# Altium PCB cirq_lcd.PcbDoc
Units mm, origin at the board's own origin, x right, y up, seen from the top; angles counter-clockwise.
Board outline 30 x 41.2 mm, 2 copper layers (Top Layer, Bottom Layer); 33 components, 26 nets, 145 pads, 60 vias.
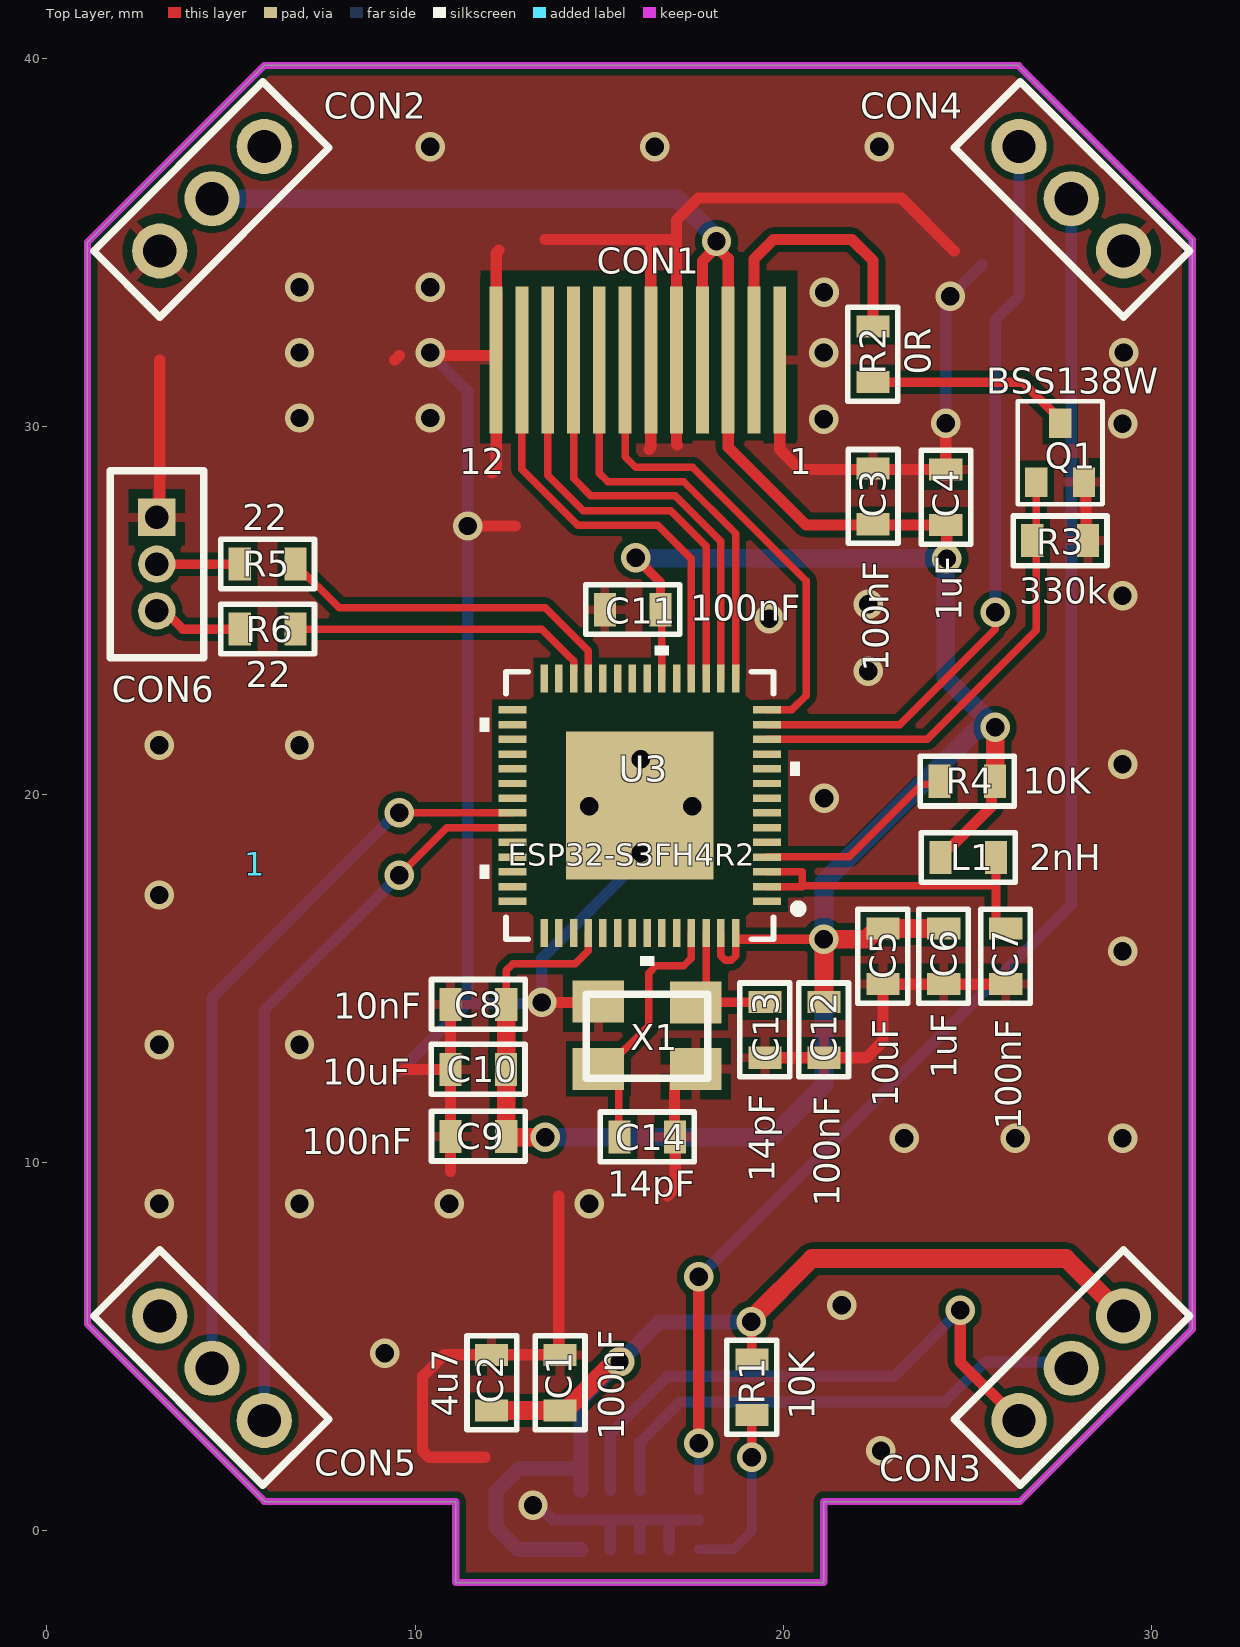
[diagram p0: Top Layer view]
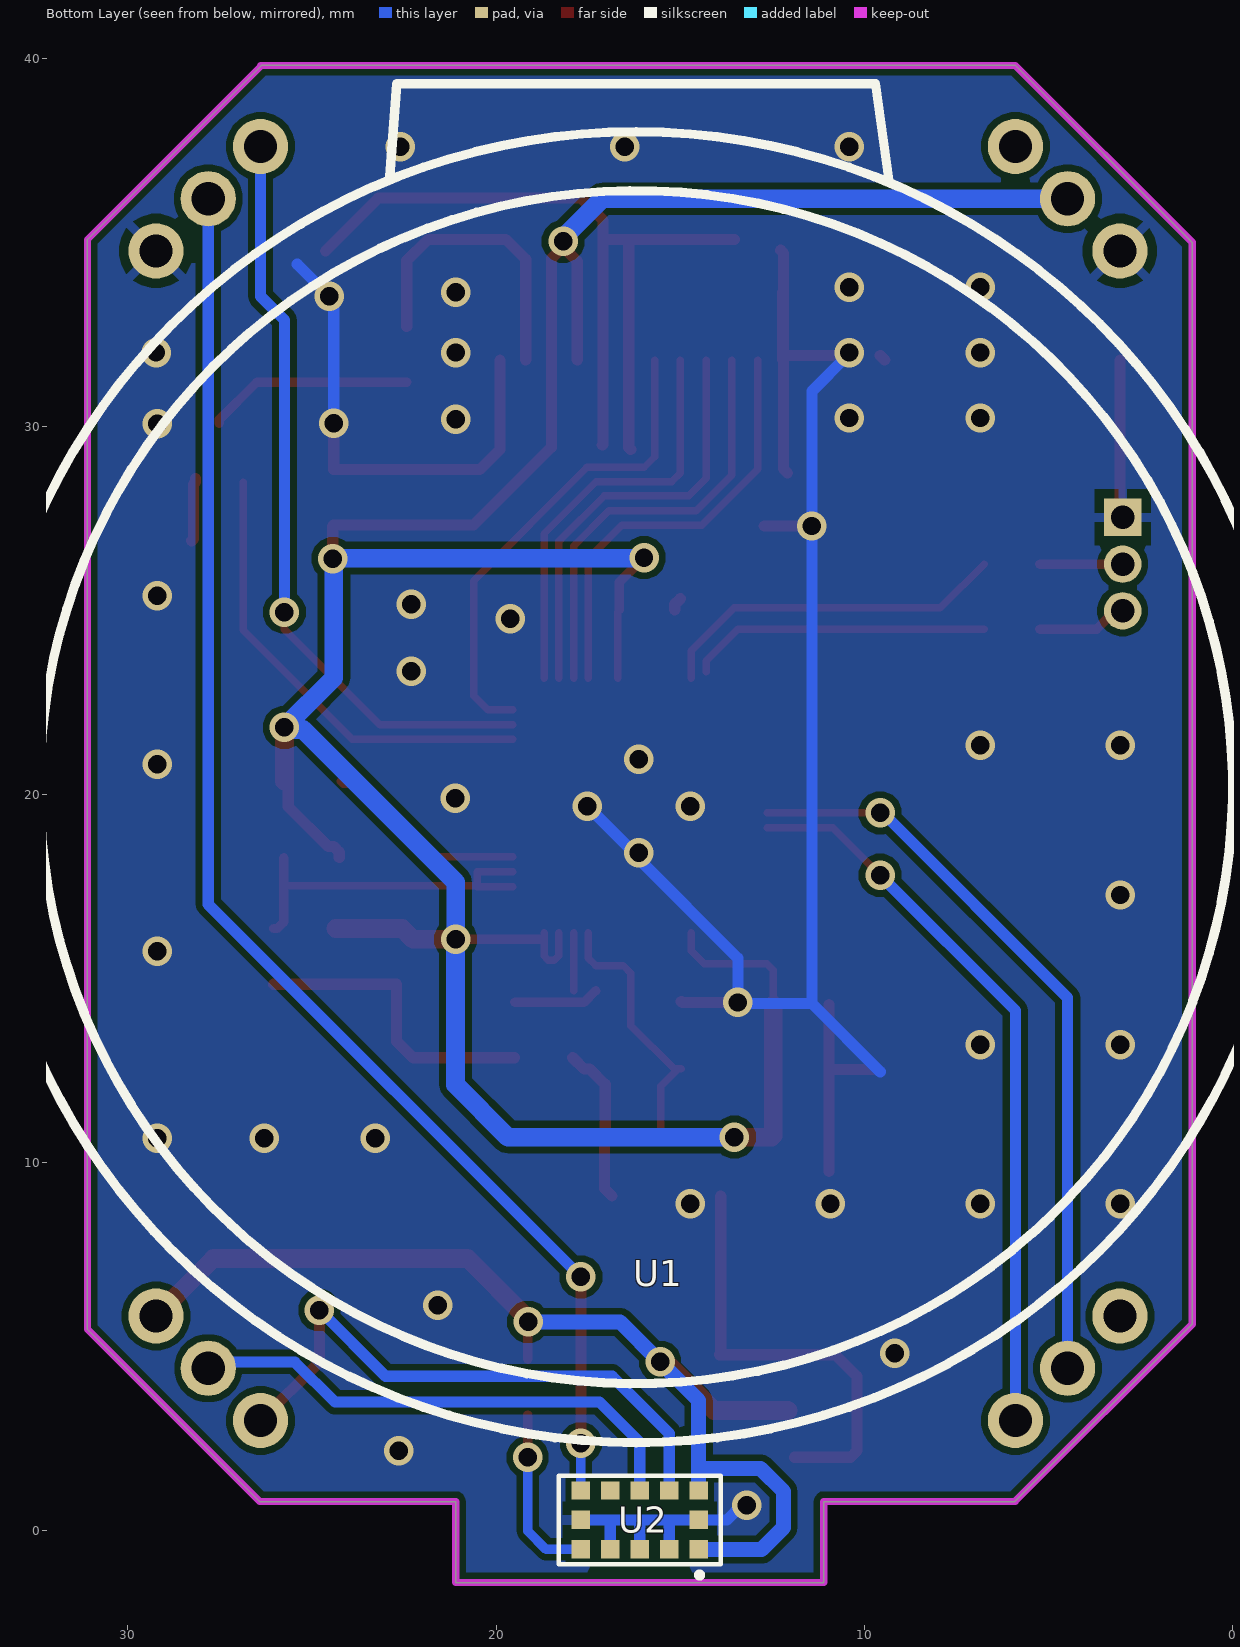
[diagram p1: Bottom Layer view, seen from below]
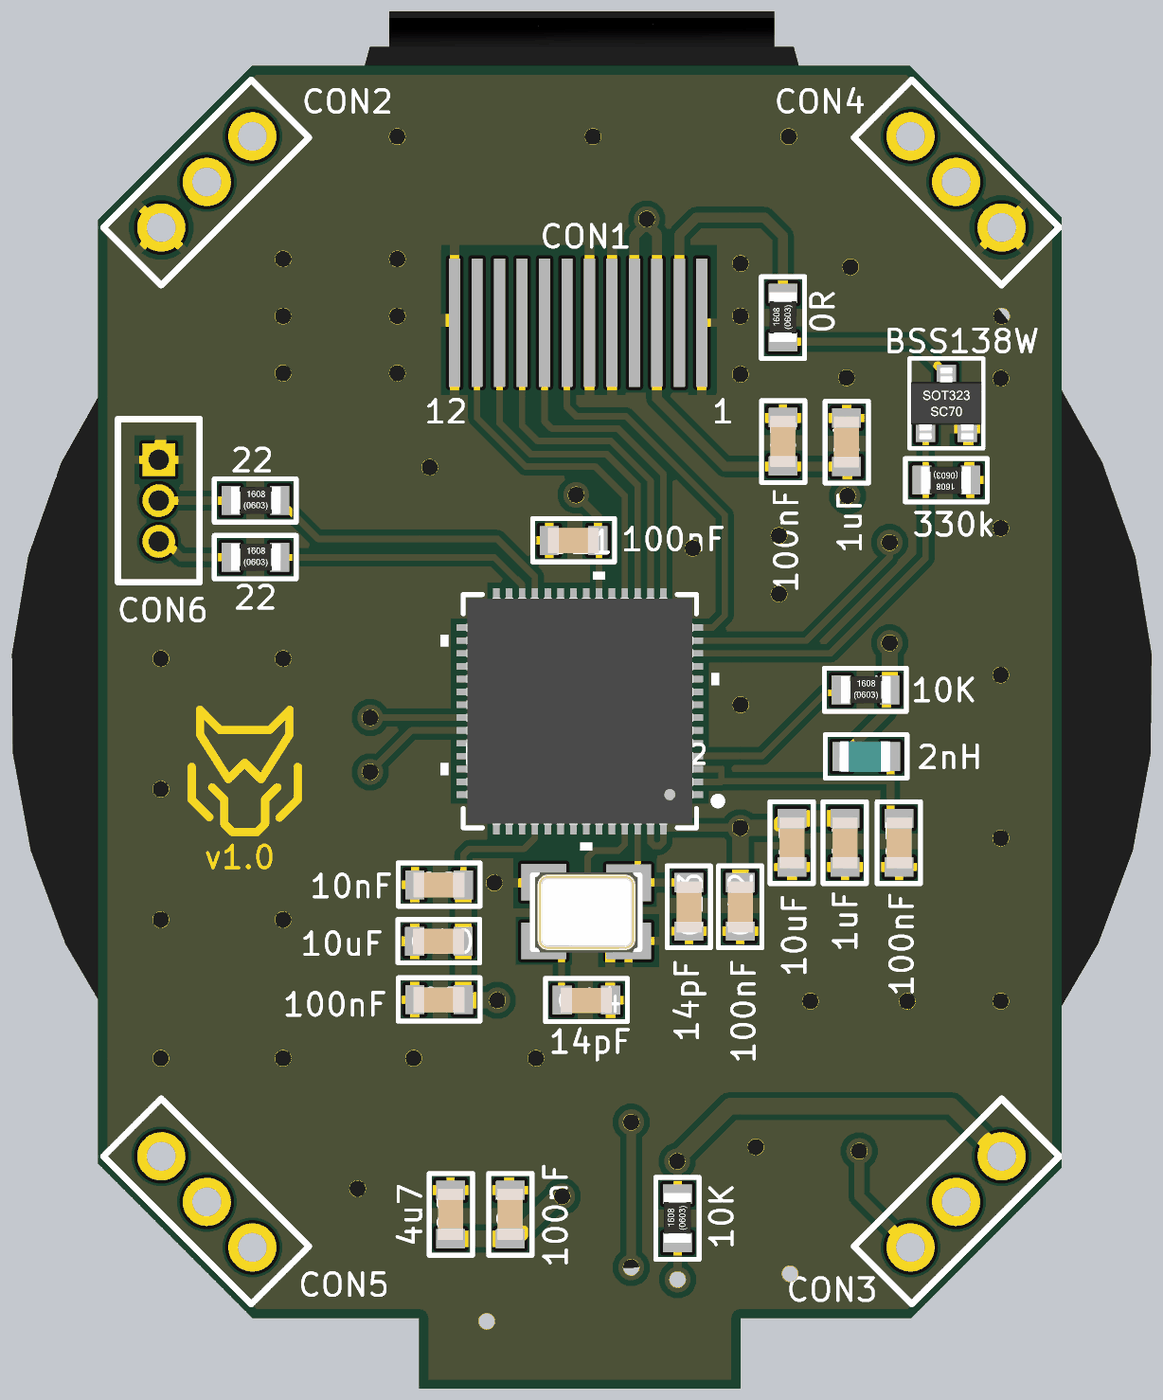
[diagram p2: 3D render of the assembled board from above, using the file's embedded part models]

## Layer stack, top to bottom
Top Solder: solder mask 0.0102, Solder Resist, Dk 3.5
Top Layer: signal copper 0.0356
Dielectric1: dielectric 0.32, FR-4, Dk 4.8
Bottom Layer: signal copper 0.0356
Bottom Solder: solder mask 0.0102, Solder Resist, Dk 3.5

## Board outline
5.916,0.8 1.1,5.616 1.1,35 5.9,39.8 26.375,39.8 31.1,35.075 31.1,5.475 26.425,0.8 21.1,0.8 21.1,-1.4 11.1,-1.4 11.1,0.8

## Design rules (kind name [scope] priority, off if disabled: settings)
Clearance [All] p1: gap=0.178 ignorepadtopadclearanceinfootprint=FALSE
PlaneConnect [All] p1: planeconnectstyle=Direct reliefexpansion=0.508 reliefentries=4 reliefconductorwidth=0.254 reliefairgap=0.254
PolygonConnect [All] p1: thpad.connectstyle=Relief thpad.reliefconductorwidth=0.254 thpad.reliefentries=4 thpad.polygonreliefangle="90 Angle" thpad.airgapwidth=0.254 smdpad.connectstyle=Relief smdpad.reliefconductorwidth=0.254 smdpad.reliefentries=4 smdpad.polygonreliefangle="90 Angle" smdpad.airgapwidth=0.254 smdpad.conductorbypadedge=TRUE smdpad.mindistance=0.381 smdpad.enablemindistance=FALSE via.connectstyle=Direct via.reliefconductorwidth=0.254 via.reliefentries=4 via.polygonreliefangle="90 Angle" via.airgapwidth=0.254
RoutingVias [All] p1: holewidth=0.813 width=1.575 viastyle="Through Hole" minholewidth=0.711 minwidth=1.27 maxholewidth=0.711 maxwidth=1.27
SilkToSolderMaskClearance SilkscreenOverComponentPads [IsPad] p1: minsilkscreentomaskgap=0.254 clearancetoexposedcopper=TRUE
SolderMaskExpansion [All] p1: expansion=0.102 istentingtop=FALSE
Width [All] p1: maxlimit=2.54 minlimit=0.203 preferedwidth=0.203 minimp=50.000000 maximp=50.000000 favimp=50.000000
28 further rules are at their usual default settings.

## Components (designator, comment, footprint, x,y, rotation, side; value= is the part's Value field where it differs from the comment)
1 "" NEWLOGO2 5.662,18.105 r0 top
C1 "100nF" C0603L 13.902,4.033 r90 top
C2 "4u7" C0603L 12.047,4.033 r90 top
C3 "100nF" C0603L 22.4,28.1 r90 top
C4 "1uF" C0603L 24.379,28.08 r90 top
C5 "10uF" C0603L 22.734,15.601 r270 top
C6 "1uF" C0603L 24.385,15.601 r270 top
C7 "100nF" C0603L 26.069,15.601 r270 top
C8 "10nF" C0603L 11.712,14.265 r180 top
C9 "100nF" C0603L 11.712,10.686 r180 top
C10 "10uF" C0603L 11.704,12.503 r180 top
C11 "100nF" C0603L 15.9,24.988 r180 top
C12 "100nF" C0603L 21.13,13.602 r270 top
C13 "14pF" C0603L 19.529,13.602 r270 top
C14 "14pF" C0603L 16.3,10.668 r180 top
CON1 "BL-128HR01A" ROUND_TFT_1_28_C 19.9,31.8 r180 top locked
CON2 "TOUCH1" HDR1X3_2mm 3.062,34.762 r45 top
CON3 "TOUCH3" HDR1X3_2mm 29.238,5.838 r225 top
CON4 "TOUCH4" HDR1X3_2mm 29.238,34.762 r135 top
CON5 "TOUCH2" HDR1X3_2mm 3.062,5.838 r315 top
CON6 "USB" HDR1X3_1mm27 2.986,27.528 r270 top
L1 "2nH" L0603 25.013,18.288 r0 top
Q1 "BSS138W" SOT-323 26.868,28.485 r0 top
R1 "10K" 1608[0603] 19.134,3.9 r90 top
R2 "0R" 1608[0603] 22.42,31.95 r90 top
R3 "330k" 1608[0603] 27.518,26.885 r180 top
R4 "10K" 1608[0603] 24.991,20.371 r0 top
R5 "22" 1608[0603] 5.985,26.268 r0 top
R6 "22" 1608[0603] 5.985,24.502 r0 top
U1 "BL-128HR01A" ROUND_TFT_1_28_S 16.2,20.2 r0 bottom
U2 "VL53L0X" SENSOR_VL53L0X 16.1,0.3 r0 bottom
U3 "ESP32-S3FH4R2" QFN56_ESP32_7X7_EXP 16.1,19.7 r180 top
X1 "40MHz" X3x2 14.647,12.296 r0 top

## Footprints (in the part's own frame and the unit in brackets; to place one, negate y for a bottom-side part, rotate by r counter-clockwise, add the part's x,y. Pads: shape width x height; smd on the part's side, far side on the other; paste and mask are expansions set on the pad)
1608[0603] [mm] "Body 1.6 x 0.8 mm (LxW typ)"
  rect 0.6x0.9 smd: 1(-0.75,-0.01) 2(0.76,-0.01)
  silkscreen extent -1.27,-0.68 1.28,0.67, body extent -0.75,-0.43 0.79,0.42, height 0.45
C0603L [mm]
  rect 0.6x0.9 smd: 1(-0.76,-0.03) 2(0.75,-0.03)
  silkscreen extent -1.28,-0.71 1.27,0.64, body extent -0.8,-0.43 0.8,0.37, height 0.8
HDR1X3_1mm27 [mil]
  rect 40x40 hole 25: 1(0,0)
  round 40 hole 25: 2(50.02,-0.01) 3(100.02,-0.01)
  silkscreen extent -50,-50 150,50
HDR1X3_2mm [mm]
  round 1.5 hole 0.9: 1(0,0) 2(2.007,0) 3(4.013,0)
  silkscreen extent -1.27,-1.27 5.23,1.27
L0603 [mm] "Chip Inductor; Body 1.6 x 0.8 mm (LxW typ)"
  rect 0.6x0.9 smd: 1(-0.75,0) 2(0.76,0)
  silkscreen extent -1.27,-0.67 1.28,0.68, body extent -0.84,-0.48 0.76,0.48, height 0.8
NEWLOGO2 [mm]
QFN56_ESP32_7X7_EXP [mil]
  rect 30x8 smd paste+0 mask+0: 1(-136,102.36) 2(-136,86.61) 3(-136,70.87) 4(-136,55.12) 5(-136,39.37) 6(-136,23.62) 7(-136,7.87) 8(-136,-7.87) 9(-136,-23.62) 10(-136,-39.37) 11(-136,-55.12) 12(-136,-70.87) 13(-136,-86.61) 14(-136,-102.36) 29(136,-102.36) 30(136,-86.61) 31(136,-70.87) 32(136,-55.12) 33(136,-39.37) 34(136,-23.62) 35(136,-7.87) 36(136,7.87) 37(136,23.62) 38(136,39.37) 39(136,55.12) 40(136,70.87) 41(136,86.61) 42(136,102.36)
  rect 8x30 smd paste+0 mask+0: 15(-102.36,-136) 16(-86.61,-136) 17(-70.87,-136) 18(-55.12,-136) 19(-39.37,-136) 20(-23.62,-136) 21(-7.87,-136) 22(7.87,-136) 23(23.62,-136) 24(39.37,-136) 25(55.12,-136) 26(70.87,-136) 27(86.61,-136) 28(102.36,-136) 43(102.36,136) 44(86.61,136) 45(70.87,136) 46(55.12,136) 47(39.37,136) 48(23.62,136) 49(7.87,136) 50(-7.87,136) 51(-23.62,136) 52(-39.37,136) 53(-55.12,136) 54(-70.87,136) 55(-86.61,136) 56(-102.36,136)
  rect 158x158 smd paste-78.5 mask+0: 57(0,0)
  silkscreen extent -173,-171 171,171, body extent -139,-139 139,139, height 35
ROUND_TFT_1_28_C [mm] "Oled tape"
  rect 0.35x4 smd: 1(0,0) 2(0.7,0) 3(1.4,0) 4(2.1,0) 5(2.8,0) 6(3.5,0) 7(4.2,0) 8(4.9,0) 9(5.6,0) 10(6.3,0) 11(7,0) 12(7.7,0)
ROUND_TFT_1_28_S [mm] "1.28 COLOR TFT 240X240 SCREEN"
  silkscreen extent -17.8,-19.1 17.8,17.8, body extent -17.84,-21.29 17.76,17.91, height 1.88
SENSOR_VL53L0X [mm]
  rect 0.5x0.5 smd: 1(-1.6,0.8) 2(-0.8,0.8) 3(0,0.8) 4(0.8,0.8) 5(1.6,0.8) 6(1.6,0) 7(1.6,-0.8) 8(0.8,-0.8) 9(0,-0.8) 10(-0.8,-0.8) 11(-1.6,-0.8) 12(-1.6,0)
  silkscreen extent -2.2,-1.2 2.2,1.57, body extent -2.22,-1.19 2.18,1.21, height 1.08
SOT-323 [mm]
  rect 0.6x0.8 smd: 1(0,0) 2(1.3,0) 3(0.65,1.6)
  silkscreen extent -0.5,-0.6 1.8,2.2, body extent -0.45,-0.32 1.75,1.92, height 1.1
X3x2 [mil]
  rect 55x45 smd: 1(13,10) 2(117,10) 3(117,81) 4(13,82)
  silkscreen extent 0,0 130,90, body extent 2,-4 128,94, height 31

## Part data
1: library part LOGO
C1 C2 C3 C4 C5 C6 C7 C8 C9 C10 C11 C12 C13 C14: library part CAP, "Capacitor"
CON1: library part ROUND_1_28_TFT_C, "1.28 COLOR TFT 240X240 CONNECTOR"
CON2 CON3 CON4 CON5 CON6: library part "Header 3", "Header, 3-Pin", LatestRevisionDate=17-Jul-2002, LatestRevisionNote="Re-released for DXP Platform.", Publisher="Altium Limited"
L1: library part INDUCTOR
Q1: "N-MOSFET", Manufacturer 1=-, Manufacturer 1 PartNo=-, Supplier 1=-, Supplier 1 PartNo=-
R1 R2 R3 R4 R5 R6: library part RES
U1: library part ROUND_1_28_TFT_S, "1.28 COLOR TFT 240X240 SCREEN"
U2: "VL53L0X - Light, 3D Time-of-Flight _ToF_ Sensor Evaluation Board", Package=None, Availability=Unavailable, MF=STMicroelectronics, MP=VL53L0X, Price=None, SnapEDA_Link=https://www.snapeda.com/parts/VL53L0X/STMicroelectronics/view-part/473967/?ref=snap
U3: library part ESP32-S3, "Bluetooth, WiFi 802.11b/g/n, Bluetooth v5.0 Transceiver Module 2.4GHz PCB Trace Surface Mount", Manufacturer="Espressif Systems", ComponentLink1Description=Datasheet, ComponentLink1URL=https://www.espressif.com/sites/default/files/documentation/esp32-s3_datasheet_en.pdf, Manufacturer Part Number=ESP32-S3
X1: library part CRYSTAL3, "TX3"

## Via types
v1: diameter 0.8, hole 0.5, Top Layer to Bottom Layer, tented both sides, 60 vias

## Nets (pads, with @x,y where several pads share a name; then routed paths per layer and width w, separated by ;. In a path a pad name is that pad's centre, name@x,y a point inside that pad or via, vN(x,y) a via of type N, cw(c..) or ccw(c..) an arc to the next point about the centre after c; other vN are vias at no path point)
3V: C1.1 C2.1 CON3.1 R1.2 U2.1 U2.11 | length 30.6
  Top Layer w0.254: v1@15.296,4.488 15.446,4.488 v1(15.55,4.592) ; R1.2 v1@19.144,5.767
  Top Layer w0.508: C2.1 14.082,3.273 v1@15.296,4.488 ; v1@19.144,5.767 20.777,7.4 27.676,7.4 CON3.1
  Bottom Layer w0.406: U2.1 12.793,-0.5 12.2,0.093 12.2,1.077 12.822,1.698 14.5,1.698 ; U2.11 14.5,1.698 ; v1(19.13,5.68) 16.638,5.68 v1(15.55,4.592) 14.5,3.542 14.5,1.698
3V3: C3.1 C4.1 C5.1 C6.1 C8.1 C9.1 C10.1 C11.1 C12.1 CON1.3 CON1.4 CON2.2 L1.1 R4.2 U3.20 U3.46 U3.55 U3.56 | length 89.8
  Top Layer w0.203: C8.1 12.472,15.225 12.656,15.41 14.353,15.41 14.7,15.757 U3.46 ; U3.20 C11.1@16.7,24.953 ; U3.55 18.3,15.622 18.419,15.503 18.587,15.503 18.7,15.615 U3.56
  Top Layer w0.254: C9.1 C9.1@12.483,10.726 ; C9.1@12.472,10.737 C9.1@12.483,10.726 ; C9.1@12.513,10.696 C9.1@12.483,10.726 ; v1(15.985,26.435) 16.663,25.758 16.663,25.021 C11.1 ; v1@18.184,34.874 18.278,34.874 v1@18.278,34.779 ; v1(18.184,35.021) 18.3,34.905 v1@18.3,34.896 ; U3.56@18.725,16.069 v1(21.1,16.069) v1@21.392,16.069 ; C4.1 C4.1@24.436,27.293
  Top Layer w0.305: CON1.4 17.8,34.49 v1@18.184,34.874 ; v1@18.278,34.779 18.5,34.557 CON1.3 18.5,29.434 20.614,27.32 C4.1 ; L1.1 24.263,18.438 24.411,18.586 24.561,18.586 25.65,19.675 25.65,20.26 R4.2 ; v1(24.436,26.405) C4.1@24.436,27.293
  Top Layer w0.508: C9.1@12.472,10.737 C8.1 ; C9.1@12.513,10.696 v1(13.531,10.696) ; C12.1 v1(21.1,16.069) ; v1@21.392,16.069 22.261,16.069 22.554,16.361 C5.1 C6.1 ; R4.2 v1@25.751,21.5
  Bottom Layer w0.254: v1(15.985,26.435) v1@16,26.42 ; v1(18.184,35.021) v1@18.184,35.116 ; v1(21.1,16.069) v1@21.103,16.066 ; v1@24.409,26.378 v1(24.436,26.405) v1@24.421,26.42
  Bottom Layer w0.508: CON2.2 17.119,36.181 v1@18.184,35.116 ; v1(13.531,10.696) 19.682,10.696 21.103,12.117 v1@21.103,16.066 ; v1@16,26.42 v1@24.421,26.42 ; v1(21.1,16.069) 21.1,17.619 25.25,21.769 25.695,21.769 v1(25.751,21.825) 24.409,23.166 v1@24.409,26.378
DISP_BL: Q1.1 R3.2 U3.12 | length 12.6
  Top Layer w0.203: U3.12 23.905,21.5 26.868,24.463 Q1.1
DISP_CS: CON1.8 U3.15 | length 11.4
  Top Layer w0.203: CON1.8 15,28.731 15.23,28.501 17.288,28.501 18.7,27.089 U3.15
DISP_DC: CON1.7 U3.14 | length 13.3
  Top Layer w0.203: CON1.7 15.7,29.167 15.985,28.882 17.538,28.882 20.614,25.806 20.614,22.685 20.229,22.3 U3.14
DISP_RST: CON1.11 U3.18 | length 11.8
  Top Layer w0.203: CON1.11 12.9,28.83 14.413,27.317 16.588,27.317 17.5,26.405 U3.18
DISP_SCL: CON1.9 U3.16 | length 11.6
  Top Layer w0.203: CON1.9 14.3,28.585 14.765,28.12 17.059,28.12 18.3,26.879 U3.16
DISP_SDA: CON1.10 U3.17 | length 11.8
  Top Layer w0.203: CON1.10 13.6,28.669 14.566,27.703 16.937,27.703 17.9,26.74 U3.17
ESP_CLK: CON5.2 U3.36 | length 20.3
  Top Layer w0.203: v1(9.571,19.5) U3.36
  Bottom Layer w0.305: CON5.2 4.481,14.481 v1@9.536,19.536
ESP_DATA: CON5.3 U3.37 | length 19.9
  Top Layer w0.203: v1(9.571,17.809) 10.862,19.1 U3.37
  Bottom Layer w0.305: CON5.3 5.9,14.138 v1(9.571,17.809)
ESP_INT: CON4.3 U3.13 | length 20.6
  Top Layer w0.203: U3.13 23.159,21.9 25.751,24.492 v1(25.751,24.953)
  Bottom Layer w0.305: v1(25.751,24.953) 25.751,32.883 26.4,33.532 CON4.3
GND: C1.2 C2.2 C3.2 C4.2 C5.2 C6.2 C7.2 C8.2 C9.2 C10.2 C11.2 C12.2 C13.2 C14.1 CON1.1 CON1.5 CON1.6 CON1.12 CON2.1 CON4.1 CON6.1 Q1.2 R3.1 U2.2 U2.3 U2.4 U2.6 U2.12 U3.57 X1.2 X1.4 | length 123.3
  Top Layer w0.305: CON6.1 3.062,27.605 3.062,31.8 ; 9.448,31.8 9.569,31.921 ; 9.7,12.533 C10.2 ; v1@10.579,31.814 10.686,31.921 12.177,31.921 CON1.12@12.2,31.899 ; 10.962,9.768 C9.2 C8.2 ; v1(11.426,27.293) 12.725,27.293 ; 11.898,2 10.379,2 10.2,2.179 10.2,4.2 10.783,4.783 C1.2@13.9,4.783 ; 12.087,28.731 12.2,28.844 CON1.12 ; CON1.12@12.223,33.648 12.223,31.823 CON1.12 ; 12.271,34.779 12.2,34.708 CON1.12@12.2,31.899 ; v1(13.437,14.353) 14.951,14.353 X1.4 ; 13.533,35.075 16.4,35.075 ; 13.9,9.1 C1.2@13.9,4.783 ; C1.2 C1.2@13.9,4.783 ; C11.2@15.002,25.316 15.15,25.168 C11.2 ; 16.347,29.373 16.4,29.426 CON1.6 16.4,35.075 ; 16.856,9.1 17.06,9.304 C14.1 17.06,10.82 17.04,10.84 17.04,12.131 17.459,12.55 X1.2 X1.2@17.92,12.852 ; 17.119,29.495 17.1,29.514 CON1.5 17.1,35.075 ; C13.2 C12.2 22.255,12.852 22.704,13.3 C5.2 C6.2 C7.2 ; CON1.1 19.9,29.373 20.443,28.83 C4.2 v1(24.409,30.085) ; 24.638,34.762 23.2,36.2 17.699,36.2 17.1,35.601 17.1,35.075 ; Q1.2@28.168,28.585 Q1.2 28.218,28.435 28.218,26.945 R3.1 ; CON1.12 CON1.12@12.2,31.899 ; 16.4,35.075 17.1,35.075
  Bottom Layer w0.305: 9.571,12.471 11.426,14.326 ; v1@10.457,31.921 11.426,30.952 v1(11.426,27.293) 11.426,14.326 ; v1(13.2,0.698) 13.334,0.698 13.732,0.3 U2.12 15.3,0.3 ; U2.2 15.3,0.3 ; U2.3 16.1,0.3 ; U2.4 16.9,0.3 ; v1@17.5,19.7 17.5,19.658 16.182,18.34 16.182,18.298 13.437,15.553 v1(13.437,14.353) 13.41,14.326 11.426,14.326 ; U2.6 16.9,0.3 ; v1(24.409,30.085) 24.409,33.409 25.4,34.4 ; CON4.1@29.086,34.762 CON4.1 ; 15.3,0.3 16.1,0.3 ; 16.1,0.3 16.9,0.3
  other v1: 22.65,2.179 9.177,4.83 21.582,6.129 3.048,8.89 6.858,8.89 10.922,8.89 14.732,8.89 23.281,10.668 26.298,10.668 29.21,10.668 3.048,13.208 6.858,13.208 29.21,15.748 3.048,17.272 16.129,18.415 14.732,19.685 17.526,19.685 21.111,19.9 29.21,20.828 16.129,20.955 3.048,21.336 6.858,21.336 22.303,23.349 19.62,24.777 22.303,25.168 29.21,25.4 29.21,30.066 21.1,30.193 6.858,30.226 10.414,30.226 6.858,32.004 10.414,32.004 21.1,32.004 29.238,32.004 24.532,33.532 21.103,33.64 6.858,33.782 10.414,33.782 10.414,37.592 16.51,37.592 22.606,37.592
NetC7_1: C7.1 L1.2 U3.2 U3.3 | length 9.6
  Top Layer w0.203: U3.2 20.509,17.5 ; U3.3 20.509,17.9 20.509,17.517 25.773,17.517
  Top Layer w0.254: L1.2 25.773,17.517 25.773,16.534 25.946,16.361 C7.1
NetC13_1: C13.1 U3.54 X1.3 | length 3.9
  Top Layer w0.203: X1.3@17.9,14.672 U3.54
  Top Layer w0.254: X1.3@17.3,14.672 X1.3 17.626,14.362 C13.1
NetC14_2: C14.2 U3.53 X1.1 | length 7.1
  Top Layer w0.203: X1.1 15.06,12.55 15.167,12.55 16.342,13.725 16.342,15.15 16.549,15.357 17.3,15.357 17.5,15.557 U3.53 ; X1.1@15.114,12.496 15.53,12.08 C14.2@15.53,10.84
NetCON1_2: CON1.2 R2.2 | length 8.2
  Top Layer w0.305: CON1.2 19.2,34.543 19.732,35.075 21.855,35.075 22.43,34.5 R2.2
NetQ1_3: Q1.3 R2.1 | length 5.6
  Top Layer w0.254: R2.1 26.503,31.2 27.518,30.185 Q1.3
NetR1_1: R1.1 U2.5 | length 4.8
  Top Layer w0.254: v1(19.144,2) R1.1
  Bottom Layer w0.254: U2.5 18.644,-0.5 19.144,0 v1(19.144,2)
NetR4_1: R4.1 U3.4 | length 5.5
  Top Layer w0.203: U3.4@19.554,18.306 21.787,18.306 23.755,20.274 24.154,20.274 R4.1
NetR5_2: R5.2 U3.25 | length 9.7
  Top Layer w0.203: R5.2 7.936,25.068 13.532,25.068 14.7,23.9 U3.25
NetR6_2: R6.2 U3.26 | length 8.2
  Top Layer w0.203: R6.2 13.437,24.492 14.114,23.815 14.117,23.815 14.3,23.632 U3.26@14.3,23.332
SCL: CON3.3 U2.10 | length 16.1
  Top Layer w0.305: v1(24.8,6) 24.8,4.592 CON3.3@26.396,2.996
  Bottom Layer w0.305: U2.10 15.3,2.651 16.849,4.2 23,4.2 v1(24.8,6)
SDA: CON3.2 U2.9 | length 14
  Bottom Layer w0.305: U2.9 16.1,2.401 17.199,3.5 24.38,3.5 25.472,4.592 27.646,4.592 CON3.2
USB_N: CON6.2 R5.1 | length 2.2
  Top Layer w0.254: CON6.2 R5.1
USB_P: CON6.3 R6.1 | length 2.5
  Top Layer w0.254: CON6.3 3.192,24.988 3.687,24.492 R6.1
VL_INT: CON4.2 U2.7 | length 39.3
  Top Layer w0.305: v1(17.7,2.378) v1(17.7,6.9)
  Bottom Layer w0.254: U2.7 v1(17.7,2.378)
  Bottom Layer w0.305: v1(17.7,6.9) 27.819,17.019 CON4.2
pads on no net: CON2.3 CON5.1 U2.8 U3.1 U3.5 U3.6 U3.7 U3.8 U3.9 U3.10 U3.11 U3.19 U3.21 U3.22 U3.23 U3.24 U3.27 U3.28 U3.29 U3.30 U3.31 U3.32 U3.33 U3.34 U3.35 U3.38 U3.39 U3.40 U3.41 U3.42 U3.43 U3.44 U3.45 U3.47 U3.48 U3.49 U3.50 U3.51 U3.52

## Polygon pours and split planes (outlines as drawn)
GND on Top Layer "GND_L01_P001" (solid, pour order 1): 1.1,35 1.1,5.6 5.9,0.8 11.1,0.8 11.1,-1.4 21.1,-1.4 21.1,0.778 26.403,0.778 31.1,5.475 31.1,35.1 26.4,39.8 5.9,39.8
GND on Bottom Layer "GND_L02_P000" (solid, pour order 0): 1.1,35 1.1,5.6 5.9,0.8 11.1,0.8 11.1,-1.4 21.1,-1.4 21.1,0.778 21.122,0.8 26.425,0.8 31.1,5.475 31.1,35.1 26.4,39.8 5.9,39.8

## Keep-outs
Keep-Out Layer:
  lines w0.2: 5.9,0.8 11.1,0.8 11.1,-1.4 21.1,-1.4 21.1,0.778 ; 5.916,0.8 1.1,5.616 1.1,35 5.9,39.8 26.4,39.8 ; 21.1,0.8 26.4,0.8 ; 26.375,39.8 31.1,35.075 31.1,5.475 26.425,0.8

## Other copper
Top Layer:
  pour cut-out: 13.09,22.579 13.101,22.569 13.101,16.81 13.221,16.69 18.979,16.69 19.11,16.821 19.1,16.831 19.1,22.579 18.979,22.7 18.963,22.683 13.256,22.683
  pour cut-out: 16.525,29.655 20.376,29.622 20.376,34.22 11.779,34.22 11.779,29.655 12.582,29.655 12.615,29.622
Bottom Layer:
  pour cut-out: 14.072,1.31 14.072,-0.888 14.112,-0.928 18.128,-0.928 18.128,1.528 17.91,1.31

## Silkscreen, mask and mechanical layers (free items; w line width, h text height)
Top Solder:
  text "v1.0" at 4.343,14.819 h0.7
Dimmensions:
  lines w0.254: -0.3,5.8 3.062,5.838 3.062,7.8 ; 29.238,8.492 29.238,5.838 32.4,5.838 ; 29.238,32.318 29.238,34.762 32.7,34.762

## Text inside footprints (layer, text, board x,y; h text height)
CON1: Top Overlay "12" at 11.2,28.7 h0.7; Top Overlay "1" at 20.159,28.7 h0.7
U3: Mechanical 13 "*" at 19.491,17.535 h0.7 r180